# Altium PCB Super Green Pill PCB.PcbDoc
Units mm, origin at the board's own origin, x right, y up, seen from the top; angles counter-clockwise.
Board outline 56.37 x 60.54 mm, 2 copper layers (Top Layer, Bottom Layer); 51 components, 52 nets, 269 pads, 70 vias.
Unrouted connection lines stored in the file: 11.
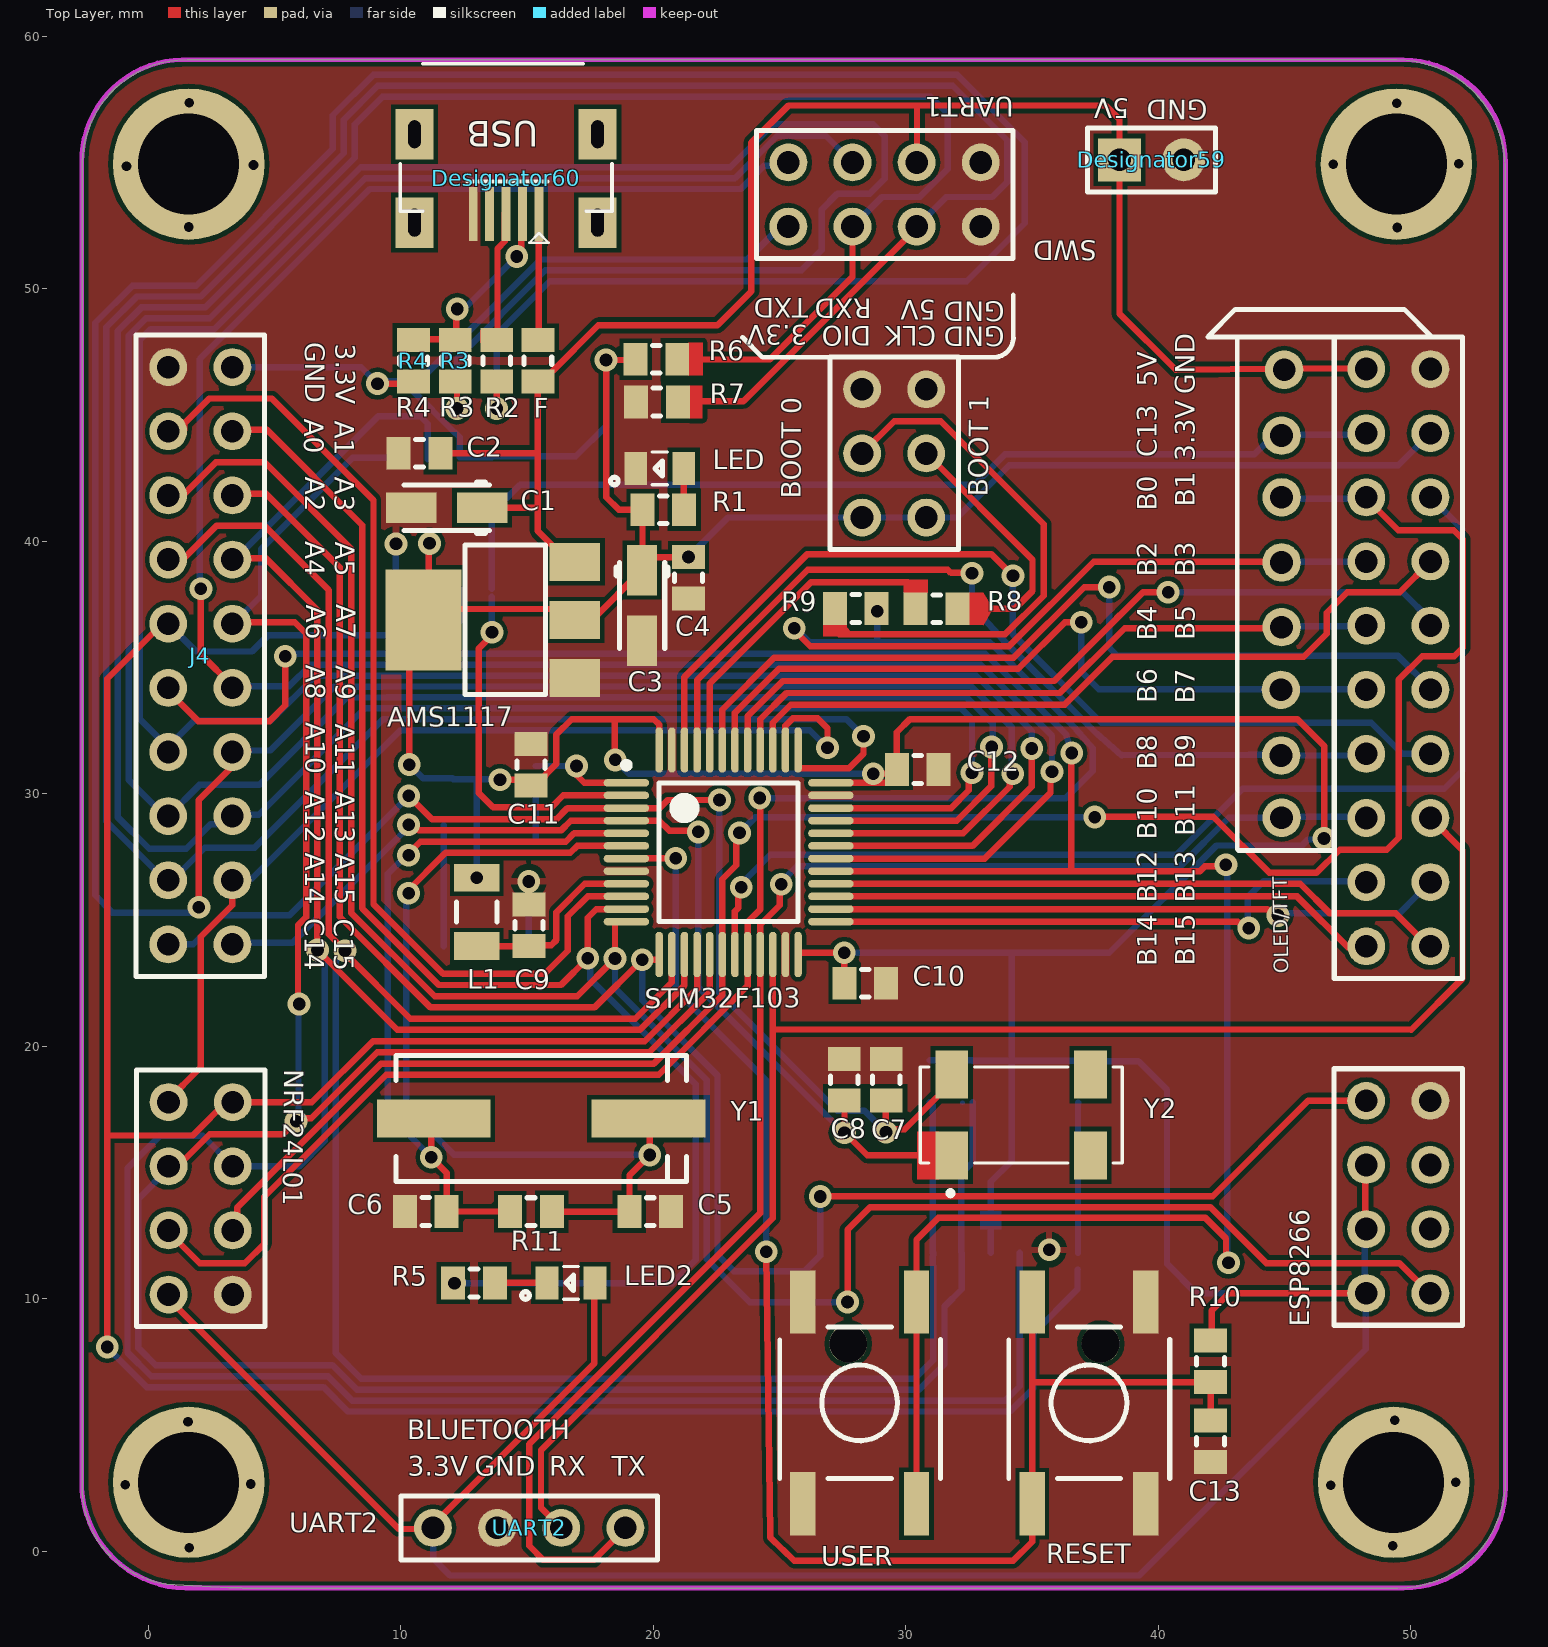
[diagram p0: Top Layer view]
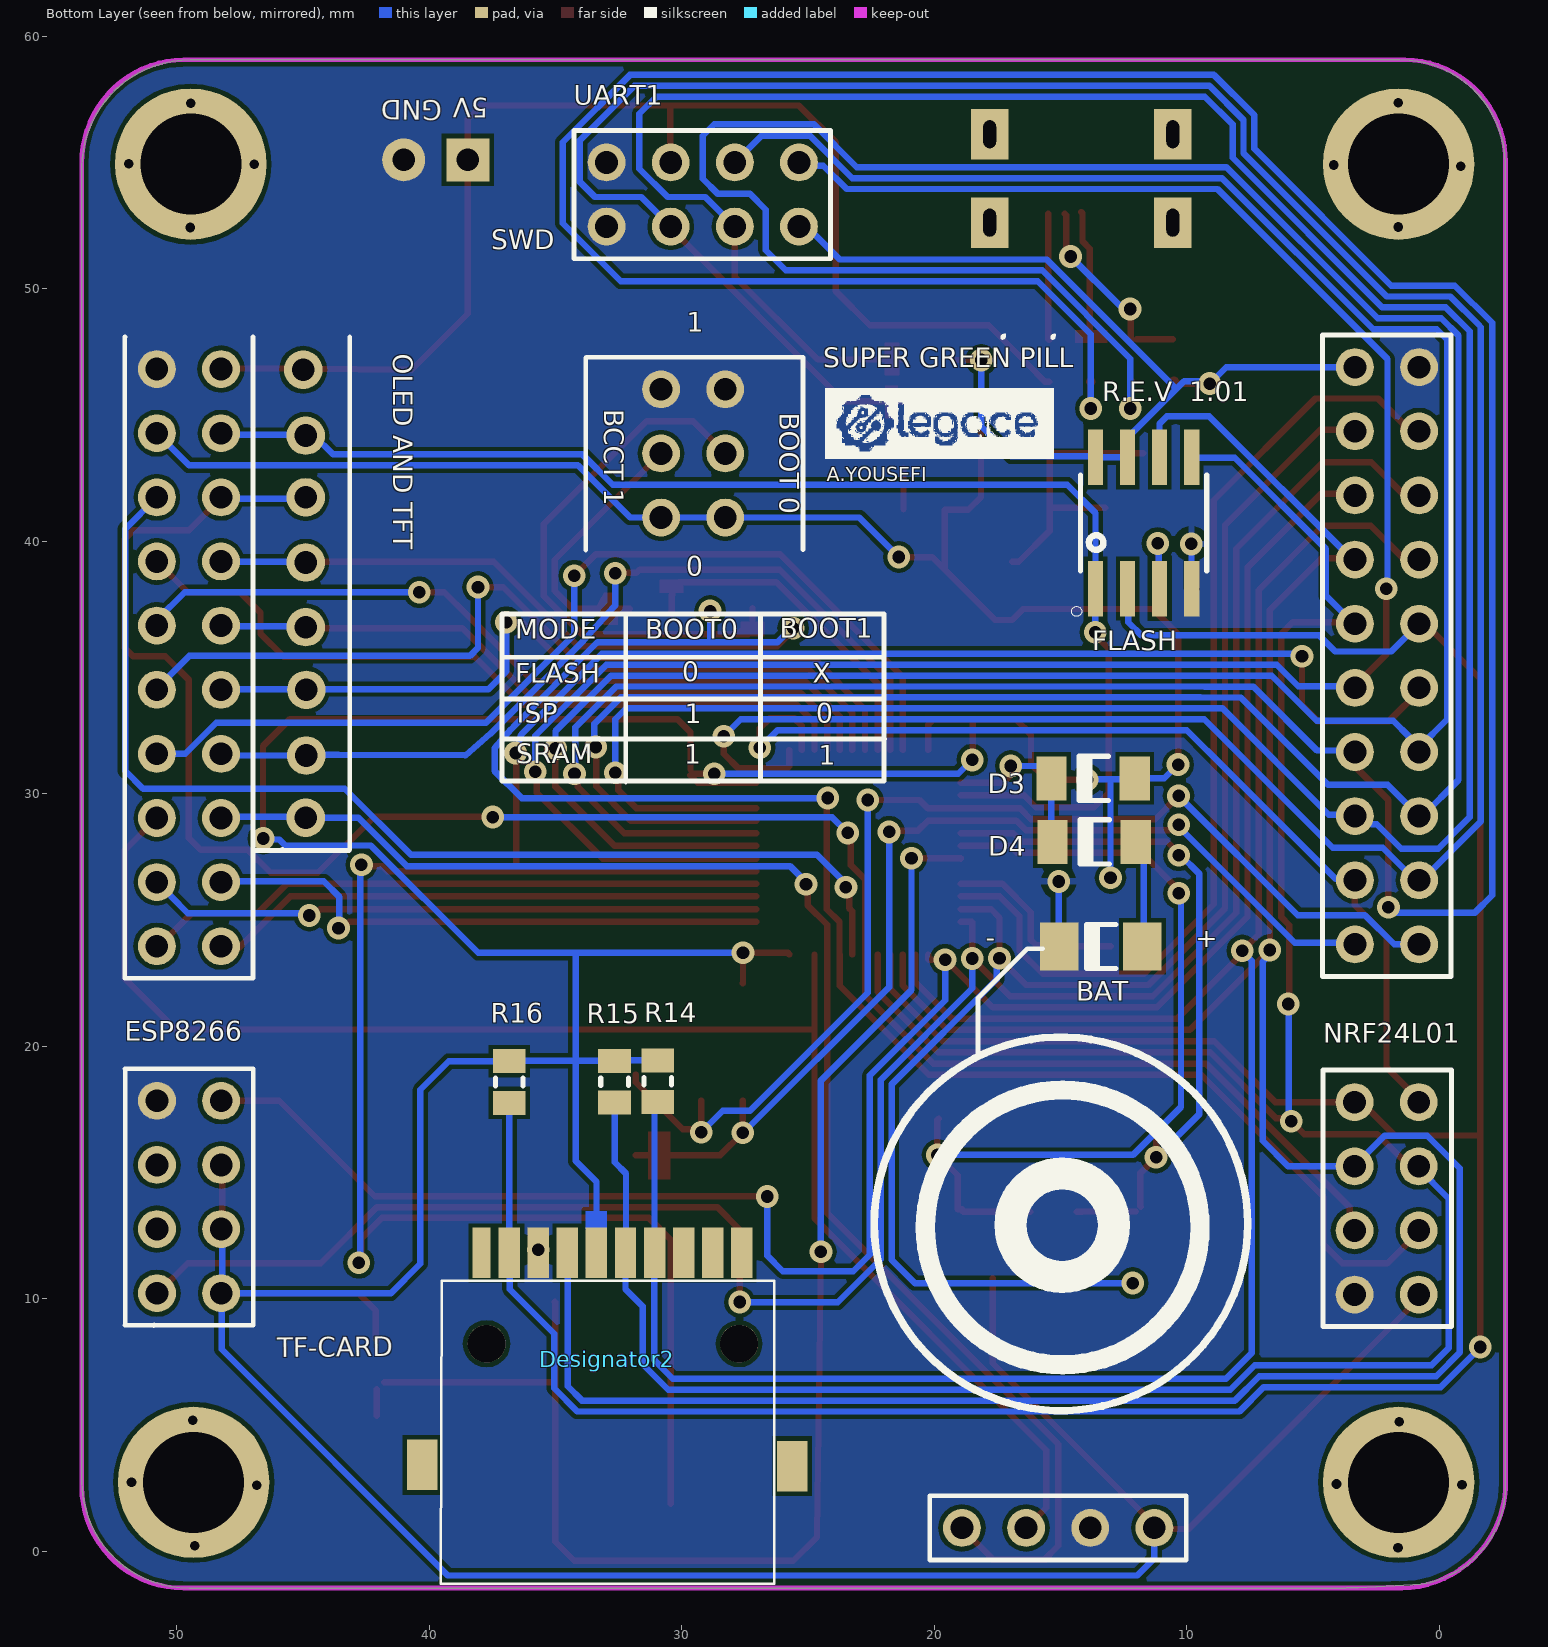
[diagram p1: Bottom Layer view, seen from below]

## Layer stack, top to bottom
Top Solder: solder mask 0.0102, Solder Resist, Dk 3.5
Top Layer: signal copper 0.0356
Dielectric 1: dielectric 0.32, FR-4, Dk 4.8
Bottom Layer: signal copper 0.0356
Bottom Solder: solder mask 0.0102, Solder Resist, Dk 3.5

## Board outline
1.051,-1.331 ccw(c1.056,-1.235) 1.052,-1.331 3.199,-1.45 3.2,-1.45 3.199,-1.45 ccw(c3.205,-1.355) 3.205,-1.451 3.707,-1.451 ccw(c3.75,-1.365) 3.75,-1.461 49.505,-1.461 ccw(c49.505,-1.365) 49.507,-1.461 cw(c49.507,-1.365) 49.505,-1.461 49.507,-1.461 ccw(c49.507,-1.365) 49.507,-1.461 ccw(c49.505,2.79) 53.756,2.79 53.756,54.773 ccw(c53.66,54.773) 53.753,54.794 ccw(c53.66,54.813) 53.755,54.813 ccw(c53.66,54.813) 53.755,54.814 ccw(c49.453,54.773) 49.453,59.076 1.534,59.076 ccw(c1.534,54.926) -2.615,54.966 ccw(c-2.52,54.965) -2.614,54.946 ccw(c-2.52,54.926) -2.616,54.926 -2.616,2.63 cw(c1.267,2.547) -2.616,2.631 -2.616,2.63 ccw(c1.267,2.547)

## Design rules (kind name [scope] priority, off if disabled: settings)
Clearance Clearance_1 [InNamedPolygon('Top Layer-GND')] p1: gap=0.254 ignorepadtopadclearanceinfootprint=FALSE
Clearance [All] p2: gap=0.178 ignorepadtopadclearanceinfootprint=TRUE
DiffPairsRouting [All] p1: maxlimit=0.254 minlimit=0.001 mostfreqgap=0.254 toplayer_minwidth=0.381 toplayer_maxwidth=0.381 toplayer_prefwidth=0.381 bottomlayer_minwidth=0.381 bottomlayer_maxwidth=0.381 bottomlayer_prefwidth=0.381 maxuncoupledlength=12.7
PolygonConnect PolygonConnect_3 [All vs IsNamedPolygon('GND_L02_P013')] p1: thpad.connectstyle=Direct thpad.reliefconductorwidth=0.254 thpad.reliefentries=4 thpad.polygonreliefangle="90 Angle" thpad.airgapwidth=0.254 smdpad.connectstyle=Direct smdpad.reliefconductorwidth=0.254 smdpad.reliefentries=4 smdpad.polygonreliefangle="90 Angle" smdpad.airgapwidth=0.254 via.connectstyle=Relief via.reliefconductorwidth=0.254 via.reliefentries=4 via.polygonreliefangle="90 Angle" via.airgapwidth=0.254
PolygonConnect PolygonConnect_2 [All vs IsNamedPolygon('GND_L01_P009')] p2: thpad.connectstyle=Direct thpad.reliefconductorwidth=0.254 thpad.reliefentries=4 thpad.polygonreliefangle="90 Angle" thpad.airgapwidth=0.254 smdpad.connectstyle=Direct smdpad.reliefconductorwidth=0.254 smdpad.reliefentries=4 smdpad.polygonreliefangle="90 Angle" smdpad.airgapwidth=0.254 via.connectstyle=Relief via.reliefconductorwidth=0.254 via.reliefentries=4 via.polygonreliefangle="90 Angle" via.airgapwidth=0.254
PolygonConnect PolygonConnect_1 [All vs IsNamedPolygon('Top Layer-GND')] p3: connectstyle=Relief reliefconductorwidth=0.254 reliefentries=4 polygonreliefangle="90 Angle" airgapwidth=0.254
PolygonConnect [All] p4: connectstyle=Relief reliefconductorwidth=0.254 reliefentries=4 polygonreliefangle="90 Angle" airgapwidth=0.254
RoutingTopology [All] p1: topology=Daisy_Simple
RoutingVias [All] p1: holewidth=0.5 width=0.9 viastyle="Through Hole" minholewidth=0.5 minwidth=0.9 maxholewidth=0.5 maxwidth=0.9
ShortCircuit [All] p1: allowed=TRUE
SolderMaskExpansion [All] p1: expansion=0.102 istentingtop=FALSE
Width [All] p1: maxlimit=0.254 minlimit=0.254 preferedwidth=0.254
27 further rules are at their usual default settings.

## Classes and differential pairs
component class WIFI: ESP8266
component class "TF CARD": R14 R15 R16
component class "SWD & BOOT": "BOOT 0" J8 R6 R7 R8 R9 UART1 UART2
component class STM32: AMS1117 BAT C1 C2 C3 C4 C5 C6 C7 C8 C9 C10 C11 C12 C13 D3 D4 F J4 L1 leD1 LED2 R1 R2 R3 R4 R5 R10 R11 RESET STM32F103 USER Y1 Y2
component class FLASH: FLASH lash
component class "2.4G INTERFACE": NRF24L01

## Components (designator, comment, footprint, x,y, rotation, side; value= is the part's Value field where it differs from the comment)
AMS1117 "AMS1117" "AMS1117 3.3" 10.905,36.888 r90 top locked
BAT "1N4148" LL4148#1 13.405,23.96 r0 bottom
"BOOT 0" "Header 3X2" HDR2X3 30.815,40.945 r90 top locked (schematic designator BOOT)
C1 "T491A" A 11.825,41.333 r180 top locked value=10uF
C2 "100nF" SMD_CAP_0805 11.57,43.492 r180 top locked
C3 "T491A" A 19.56,37.465 r270 top locked value=10uF
C4 "100nF" SMD_CAP_0805 21.4,39.38 r270 top locked
C5 "30pF" SMD_CAP_0805 19.06,13.455 r0 top locked
C6 "30pF" SMD_CAP_0805 11.825,13.46 r180 top locked
C7 "20pF" SMD_CAP_0805 29.235,19.505 r270 top locked
C8 "20pF" SMD_CAP_0805 27.57,19.505 r270 top locked
C9 "100nF" SMD_CAP_0805 15.08,23.97 r90 top locked
C10 "100nF" SMD_CAP_0805 27.58,22.5 r0 top locked
C11 "100nF" SMD_CAP_0805 15.165,30.33 r90 top
C12 "100nF" SMD_CAP_0805 31.3,30.965 r180 top locked
C13 "106" SMD_CAP_0805 42.077,3.531 r90 top locked
D3 "1N4148" LL4148#2 13.705,30.615 r0 bottom locked
D4 "1N4148" LL4148#2 13.665,28.1 r0 bottom locked
Designator2 "Comment" 112I-TDAR-R 31.725,11.575 r180 bottom
Designator59 "Comment" HDR-1X2 38.47,55.11 r0 top
Designator60 "Comment" USB-Micro_B/4legs 14.175,56.125 r180 top
ESP8266 "Header 4X2" HDR2X4 50.78,10.225 r90 top (schematic designator "J6 ESP8266")
F "18R" SMD_RES_0805 15.435,46.325 r90 top (schematic designator FUSE)
FLASH "AT45DB041E-SSHNHA-T" *SOIC127P600X175-8N 11.705,40.73 r90 bottom locked (schematic designator "FLASH 2")
J3 "Header 10X2" HDR2X10#1 48.245,23.965 r90 top locked
J4 "Header 10X2" HDR2X10#2 3.335,24.04 r90 top
L1 "Inductor" INDC3216 13.015,25.325 r270 top locked value=10mH (schematic designator L1100uH)
LED "LSR976" *0805_R_LSR976(Primary) 20.265,42.89 r180 top locked (schematic designator D1)
LED2 "LSR976" *0805_R_LSR976(Primary) 16.745,10.635 r180 top (schematic designator D2)
NRF24L01 "Header 4X2" HDR2X4 3.35,10.17 r90 top
R1 "1.5K" SMD_RES_0805 21.23,41.25 r180 top locked
R2 "18R" SMD_RES_0805 13.805,47.975 r270 top
R3 "18R" SMD_RES_0805 12.165,47.985 r270 top
R4 "1.5K" SMD_RES_0805 10.505,47.985 r270 top
R5 "1.5K" SMD_RES_0805 13.73,10.625 r180 top
R6 "10K" SMD_RES_0805 20.955,47.215 r180 top
R7 "10K" SMD_RES_0805 19.325,45.52 r0 top
R8 "100K" SMD_RES_0805 30.4,37.33 r0 top locked
R9 "100K" SMD_RES_0805 27.195,37.345 r0 top locked
R10 "10K" SMD_RES_0805 42.077,8.356 r270 top locked
R11 "1M" SMD_RES_0805 15.985,13.455 r180 top locked
R14 "10K" SMD_RES_0805 30.95,19.445 r270 bottom locked
R15 "10K" SMD_RES_0805 32.655,19.43 r270 bottom locked
R16 "10K" SMD_RES_0805 36.83,19.415 r270 bottom locked
RESET "RESET" SW-PB 37.26,5.88 r90 top locked (schematic designator S1)
STM32F103 "STM32F103C8T6" LQFP48_N 22.99,27.689 r0 top locked (schematic designator STM)
UART1 "Header 4X2" HDR2X4 25.355,52.47 r0 top (schematic designator "J7 - UART")
UART2 "BLUTOOTH" HDR1X4 11.28,0.93 r0 top (schematic designator J8)
USER "Switch PB" SW-PB 28.18,5.88 r90 top locked (schematic designator S2)
Y1 "12 MHz" "Crystal SMD" 16.135,17.14 r180 top locked
Y2 "ABS25-32.768KHZ-6-T" *XTAL_ABS25-32.768KHZ-6-T 34.575,17.285 r90 top locked

## Footprints (in the part's own frame and the unit in brackets; to place one, negate y for a bottom-side part, rotate by r counter-clockwise, add the part's x,y. Pads: shape width x height; smd on the part's side, far side on the other; paste and mask are expansions set on the pad)
112I-TDAR-R [mm]
  rect 0.7x2 smd: 1(-6.2,0.25)
  rect 0.85x2 smd: 2(-5.1,0.25) 3(-3.95,0.25) 4(-2.8,0.25) 5(-1.65,0.25) 6(-0.5,0.25) 7(0.65,0.25) 8(1.8,0.25) 9(2.95,0.25) 10(4.1,0.25)
  rect 1.2x2 smd: 11(-8.55,-8.15) 12(6.1,-8.2)
  round 1.5 hole 1.5: 13(-6,-3.35) 14(4,-3.35)
  silkscreen extent -7.82,-12.85 5.4,-0.85
*0805_R_LSR976(Primary) [mm]
  rect 0.9x1.3 smd: A(-0.95,0) C(0.95,0)
  silkscreen extent -0.3,-0.65 1.95,0.65
*SOIC127P600X175-8N [mm]
  rect 2.2x0.6 smd: 1(-2.6,1.905) 2(-2.6,0.635) 3(-2.6,-0.635) 4(-2.6,-1.905) 5(2.6,-1.905) 6(2.6,-0.635) 7(2.6,0.635) 8(2.6,1.905)
  silkscreen extent -3.7,-2.5 1.9,2.85
*XTAL_ABS25-32.768KHZ-6-T [mm]
  rect 1.9x1.3 smd: 1(-1.6,2.75) 2(-1.6,-2.75) 3(1.6,-2.75) 4(1.6,2.75)
  silkscreen extent -3.2,-4 1.9,4
A [mm] "Capacitor, SM Tantalum; Body 3.2 x 1.6 mm (LxW typ)"
  rect 2x1.2 smd: 1(-1.4,0) 2(1.4,0)
  silkscreen extent -1.7,-1 1.7,1, body extent -1.6,-0.8 1.6,0.8, height 1.6
"AMS1117 3.3" [mm]
  rect 1.5x2 smd: 1(-2.3,-6) 2(0,-6) 3(2.3,-6)
  rect 4x3 smd: 2(0,0)
  silkscreen extent -2.95,-4.82 2.97,-1.65, body extent -3.28,-6.68 3.22,0.32, height 1.85
"Crystal SMD" [mm]
  rect 4.5x1.5 smd: 1(-3.683,0) 2(4.817,0)
  silkscreen extent -5.18,-2.5 6.32,2.5, body extent -5.64,-2.25 6.66,2.25, height 5.18
HDR1X4 [mm] "Connector; Header; 4 Position"
  round 1.5 hole 0.9: 1(0,0) 2(2.54,0) 3(5.08,0) 4(7.62,0)
  silkscreen extent -1.27,-1.27 8.89,1.27
HDR2X3 [mm] "Connector; Header; 3x2 Position"
  round 1.5 hole 0.9: 1(0,0) 2(0,2.54) 3(2.54,0) 4(2.54,2.54) 5(5.08,0) 6(5.08,2.54)
  silkscreen extent -1.27,-1.27 6.35,3.81
HDR2X4 [mm] "Connector; Header; 4x2 Position"
  round 1.5 hole 0.9: 1(0,0) 2(0,2.54) 3(2.54,0) 4(2.54,2.54) 5(5.08,0) 6(5.08,2.54) 7(7.62,0) 8(7.62,2.54)
  silkscreen extent -1.27,-1.27 8.89,3.81
HDR2X10#1 [mm] "Connector; Header; 10x2 Position"
  round 1.5 hole 0.9: 1(0,0) 2(0,-2.54) 3(2.54,0) 4(2.54,-2.54) 5(5.08,0) 6(5.08,-2.54) 7(7.62,0) 8(7.62,-2.54) 9(10.16,0) 10(10.16,-2.54) 11(12.7,0) 12(12.7,-2.54) 13(15.24,0) 14(15.24,-2.54) 15(17.78,0) 16(17.78,-2.54) 17(20.32,0) 18(20.32,-2.54) 19(22.86,0) 20(22.86,-2.54)
  silkscreen extent -1.27,-3.81 24.13,1.27
HDR2X10#2 [mm] "Connector; Header; 10x2 Position"
  round 1.5 hole 0.9: 1(0,0) 2(0,2.54) 3(2.54,0) 4(2.54,2.54) 5(5.08,0) 6(5.08,2.54) 7(7.62,0) 8(7.62,2.54) 9(10.16,0) 10(10.16,2.54) 11(12.7,0) 12(12.7,2.54) 13(15.24,0) 14(15.24,2.54) 15(17.78,0) 16(17.78,2.54) 17(20.32,0) 18(20.32,2.54) 19(22.86,0) 20(22.86,2.54)
  silkscreen extent -1.27,-1.27 24.13,3.81
HDR-1X2 [mm] "إإصë£¬2½إ"
  rect 1.7x1.7 hole 0.9: 1(0,0)
  round 1.7 hole 0.9: 2(2.54,0)
  silkscreen extent -1.27,-1.27 3.81,1.27, body extent -1.27,-1.27 3.81,1.27, height 8.5
INDC3216 [mm] "Chip Inductor, Body 3.2x1.6mm, IPC High Density"
  rect 1.1x1.8 smd: 1(-1.35,0) 2(1.35,0)
  silkscreen extent -0.4,-0.8 0.4,0.8
LL4148#1 [mm] "MELF Diode, 2-Leads, Body 3.5x1.4mm, IPC Medium Density"
  rect 1.524x1.905 smd: 1(-1.65,0) 2(1.65,0)
  silkscreen extent -0.61,-0.88 0.57,0.87, body extent -1.78,-0.75 1.72,0.75, height 1.55
LL4148#2 [mm] "MELF Diode, 2-Leads, Body 3.5x1.4mm, IPC Medium Density"
  rect 1.2x1.75 smd: 1(-1.65,0) 2(1.65,0)
  silkscreen extent -0.61,-0.87 0.57,0.87, body extent -1.78,-0.75 1.72,0.75, height 1.55
LQFP48_N [mm] "Thin QFP, 48-Leads, Body 7x7mm, Pitch 0.5mm, IPC Medium Density"
  oval 1.8x0.3 smd: 1(-4.05,2.75) 2(-4.05,2.25) 3(-4.05,1.75) 4(-4.05,1.25) 5(-4.05,0.75) 6(-4.05,0.25) 7(-4.05,-0.25) 8(-4.05,-0.75) 9(-4.05,-1.25) 10(-4.05,-1.75) 11(-4.05,-2.25) 12(-4.05,-2.75) 25(4.05,-2.75) 26(4.05,-2.25) 27(4.05,-1.75) 28(4.05,-1.25) 29(4.05,-0.75) 30(4.05,-0.25) 31(4.05,0.25) 32(4.05,0.75) 33(4.05,1.25) 34(4.05,1.75) 35(4.05,2.25) 36(4.05,2.75)
  oval 0.3x1.8 smd: 13(-2.75,-4.05) 14(-2.25,-4.05) 15(-1.75,-4.05) 16(-1.25,-4.05) 17(-0.75,-4.05) 18(-0.25,-4.05) 19(0.25,-4.05) 20(0.75,-4.05) 21(1.25,-4.05) 22(1.75,-4.05) 23(2.25,-4.05) 24(2.75,-4.05) 37(2.75,4.05) 38(2.25,4.05) 39(1.75,4.05) 40(1.25,4.05) 41(0.75,4.05) 42(0.25,4.05) 43(-0.25,4.05) 44(-0.75,4.05) 45(-1.25,4.05) 46(-1.75,4.05) 47(-2.25,4.05) 48(-2.75,4.05)
  silkscreen extent -4.17,-2.75 2.75,3.57, body extent -3.5,-3.5 3.5,3.5, height 1.6
SMD_CAP_0805 [mm]
  rect 0.95x1.3 smd: 1(0,0) 2(1.65,0)
  silkscreen extent 0.67,-0.55 0.98,0.55, body extent -0.19,-0.63 1.84,0.63, height 0.65
SMD_RES_0805 [mm] "Chip Resistor, 2-Leads, Body 2.0x1.3mm, IPC High Density _ (0.100 W)"
  rect 0.95x1.3 smd: 1(0,0) 2(1.65,0)
  silkscreen extent 0.68,-0.55 0.97,0.55, body extent -0.19,-0.63 1.84,0.64, height 0.6
SW-PB [mm]
  rect 2.5x1 smd: 1(-3.992,2.25) 1(3.993,2.25) 2(-3.992,-2.25) 2(3.993,-2.25)
  silkscreen extent -3,-3.2 3,3.18, body extent -4.5,-3 4.5,3, height 5
USB-Micro_B/4legs [mm] "microï؟½ï؟½USB ï؟½ï؟½5.7*7.8*2.5mm"
  rect 0.35x2.15 smd: 1(-1.3,3.154) 2(-0.65,3.154) 3(0,3.154) 4(0.65,3.154) 5(1.3,3.154)
  rect 1.5x2 hole 0.5 slot 1.1 at 90 deg: 5(-3.625,0) 5(-3.625,3.5) 5(3.625,3.5) 5(3.625,0)
  silkscreen extent -4.19,-2.79 4.19,4.3, body extent -4,-2.72 4,3.88, height 2.7

## Part data
BAT D3 D4: library part "Diode 1N4148", "High Conductance Fast Diode", Code_JEDEC=DO-204-AH, ComponentLink1Description="Manufacturer Link", ComponentLink1URL=http://www.fairchildsemi.com/, ComponentLink2Description=Datasheet, ComponentLink2URL=http://www.fairchildsemi.com/ds/1N%2F1N4148.pdf, DatasheetVersion=1997, LatestRevisionDate=17-Jul-2002, LatestRevisionNote="Re-released for DXP Platform.", PackageDescription="Diode, Axial; Body 3.8 x 1.9 mm (LxDia. max), Lead Dia. 0.53 mm (max)", PackageReference=DO-35, Published=8-Jun-2000, Publisher="Altium Limited"
"BOOT 0": "Header, 3-Pin, Dual row", LatestRevisionDate=17-Jul-2002, LatestRevisionNote="Re-released for DXP Platform.", Publisher="Altium Limited"
C1 C3: "Solid Tantalum Chip Capacitor, Standard T491 Series - Industrial Grade", PackageDocument=Mar-2001, Code_JEITA=3216-18, ComponentLink1Description="Manufacturer Link", ComponentLink1URL=http://www.kemet.com/, ComponentLink2Description=Datasheet, ComponentLink2URL=http://www.kemet.com/kemet/web/homepage/kechome.nsf/vapubfilesname/F3102TA.pdf/$file/F3102TA.pdf, DatasheetDocument=Mar-2001, LatestRevisionDate=19-Mar-2004, LatestRevisionNote="Silkscreen dimensions re-sized.", PackageReference=A, Published=17-Jul-2002, Publisher="Altium Limited"
C2 C4 C5 C6 C7 C8 C9 C10 C11 C12 C13: library part Cap-Bipolar, "Bipolar Capacitor", Voltage=100V, Adding Date=1387/12/20, Designer="Saeid Jorablo", Organazation=ControTec
ESP8266 NRF24L01 UART1: "Header, 4-Pin, Dual row", LatestRevisionDate=17-Jul-2002, LatestRevisionNote="Re-released for DXP Platform.", Publisher="Altium Limited"
F R1 R2 R3 R4 R5 R6 R7 R8 R9 R11 R14 R15 R16: library part Resistor, "Resistor", Power="1/8 W", Tolerance=5%
FLASH: "Memory: Serial Flash; 4Mbit; SPI / RapidS; 85MHz; 1.65أ·3.6V; SO8", Package="SOIC-8 Adesto Technologies", Availability=Unavailable, MF=Adesto, MP=AT45DB041E-SSHNHA-T, Price=None, SnapEDA_Link=https://www.snapeda.com/parts/AT45DB041E-SSHNHA-T/Adesto%20Technologies/view-part/?ref=snap
J3 J4: "Header, 10-Pin, Dual row", LatestRevisionDate=17-Jul-2002, LatestRevisionNote="Re-released for DXP Platform.", Publisher="Altium Limited"
LED LED2: "SMD LED [Osram Semiconductors] LSR976 SMD LED", Package="0805 Osram", Availability=Unavailable, MF="OSRAM Opto", MP=LSR976, Price=None, SnapEDA_Link=https://www.snapeda.com/parts/LSR976/OSRAM%20Opto%20Semiconductors%20Inc./view-part/?ref=snap
R10: library part Resistor, "Resistor", Power="1/8 W", Tolerance=9
RESET: library part "Switch PB", "Push Button Switch"
STM32F103: "STM32 ARM-based 32-bit MCU with 64 Kbytes Flash, 48-pin LQFP, Industrial Temperature", ComponentLink1Description="Manufacturer Link", ComponentLink1URL=www.st.com/stm32, ComponentLink2Description=Datasheet, ComponentLink2URL=http://www.st.com/stonline/products/literature/ds/13587.pdf, DatasheetVersion="rev6, Mar-2008", PackageDescription="48-Pin Low-Profile Quad Flat Pack, 7 x 7 mm Body, 0.5 mm Pitch (LQFP48)", PackageReference=LQFP48, PackageVersion=Mar-2008, Published=30-May-2008, Publisher="Altium Limited"
UART2: library part "Header 4", "Header, 4-Pin", LatestRevisionDate=17-Jul-2002, LatestRevisionNote="Re-released for DXP Platform.", Publisher="Altium Limited"
USER: "Push Button Switch"
Y1: library part XTAL, "XTAL Crystal", ComponentLink1Description=Datasheet, ComponentLink2Description=Reference, Design Date=2017-1-3, Designer="ABBAS BASEREH", Mounting Technology="Surface Mount\Through-Hole", Status=Unreleased
Y2: "ABS25 Series 32.768 kHz آ±20 ppm 6 pF -40 to +85 آ°C SMT Low Frequency Crystal", Package="4-4 Abracon", Availability=Unavailable, MF=Abracon, MP=ABS25-32.768KHZ-6-T, Price=None, SnapEDA_Link=https://www.snapeda.com/parts/ABS25-32.768KHZ-6-T/Abracon%20LLC/view-part/?ref=snap
L1: Code_IEC=1005, Code_JEITA=0402, LatestRevisionDate=29-May-2009, LatestRevisionNote="IPC-7351 Footprint Added.", PackageDescription="Chip Inductor", PackageReference=0402-A, Published=8-Jun-2000, Publisher="Altium Limited"

## Free pads (board coordinates)
  round 1.524 hole 0.9: 3(44.991,46.797) 4(44.889,44.19) 5(44.89,41.745) 6(44.889,39.165) 7(44.889,36.605) 8(44.863,34.12) 9(44.87,31.52) 10(44.89,29.055)
  round 0.381 hole 0.381: 15(-0.905,2.645) 15(-0.86,54.86) 15(1.58,5.135) 15(1.615,52.45) 15(1.625,57.37) 15(1.63,0.14) 15(4.065,2.67) 15(4.17,54.905) 15(46.835,2.62) 15(46.93,54.935) 15(49.285,0.215) 15(49.37,5.195) 15(49.45,57.36) 15(49.465,52.43) 15(51.79,2.73) 15(51.9,54.96)
  round 6 hole 4: 16(1.605,2.73) 16(1.605,54.945) 16(49.33,2.73) 16(49.44,54.945)

## Via types
v1: diameter 0.9, hole 0.5, Top Layer to Bottom Layer, tented both sides, 67 vias
v2: diameter 0.9, hole 0.5, Top Layer to Bottom Layer, 3 vias

## Nets (pads, with @x,y where several pads share a name; then routed paths per layer and width w, separated by ;. In a path a pad name is that pad's centre, name@x,y a point inside that pad or via, vN(x,y) a via of type N, cw(c..) or ccw(c..) an arc to the next point about the centre after c; other vN are vias at no path point)
BOOT0: R8.1 STM32F103.44 | length 13.5
  Top Layer w0.254: STM32F103.44 22.24,34.37 26.259,38.389 30.091,38.389 30.375,38.105 30.375,37.88 30.395,37.86 R8.1@30.395,37.135
GND: "BOOT 0.5" "BOOT 0.6" AMS1117.1 BAT.2 C1.2 C2.2 C3.2 C4.2 C5.2 C6.2 C7.1 C8.1 C9.2 C10.2 C11.2 C12.1 C13.1 Designator2.3 Designator59.2 Designator60.5@12.875,52.971 ESP8266.7 FLASH.4 J3.20 J4.20 LED.C NRF24L01.1 R7.1 RESET.2 STM32F103.8 STM32F103.23 STM32F103.35 STM32F103.47 UART1.7 UART1.8 UART2.2 USER.1 | length 4.5
  Bottom Layer w0.254: FLASH.4 9.808,38.138 9.808,39.893 v2(9.815,39.9) ; BAT.2 15.07,23.975 v2(15.07,26.53) ; Designator2.3 35.675,11.935 v2(35.685,11.945)
NetBAT_1: BAT.1 D4.1 | length 4.8
  Bottom Layer w0.254: D4.1@11.7,28.765 11.7,28.5 11.705,28.495 BAT.1@11.705,23.97
NetBOOT_3: "BOOT 0.3" R8.2 | length 10.5
  Top Layer w0.254: 30.815,43.485 35.026,39.274 35.026,38.037 34.313,37.325 32.616,37.325 32.05,37.325 R8.2
NetBOOT_4: "BOOT 0.4" R9.1 | length 22.1
  Top Layer w0.254: R9.1 27.195,36.5 27.364,36.331 33.948,36.331 35.471,37.853 35.471,40.679 31.39,44.76 29.55,44.76 28.275,43.485
NetD1_A: LED.A R1.1 | length 1.6
  Top Layer w0.254: R1.1@21.215,41.265 LED.A
NetD2_C: LED2.C R5.1 | length 2
  Top Layer w0.254: R5.1@13.715,10.645 LED2.C@15.735,10.645
NetR2_1: Designator60.3 R2.1 | length 5.6
  Top Layer w0.191: R2.1@13.675,48.105 R2.1 13.868,48.038 R2.1@13.91,48.08
  Top Layer w0.254: R2.1@13.816,48.253 13.868,48.202 R2.1@13.868,48.163 ; R2.1@13.828,48.163 13.785,48.12 13.835,48.17 13.835,51.59 14.127,51.882 14.127,52.999 Designator60.3@14.175,53.047
NetR3_1: Designator60.2 R3.1 R4.1 | length 7.7
  Top Layer w0.254: R4.1@10.545,48.005 R3.1@11.975,48.005 ; R3.1 12.21,48.03 12.21,49.175 v1(12.24,49.205) ; v1(14.598,51.285) 14.598,51.46 14.777,51.639 14.777,52.923 Designator60.2
  Bottom Layer w0.254: v1(12.24,49.205) 12.364,49.329 12.641,49.329 v1(14.598,51.285)
NRST: C13.2 R10.2 RESET.1 STM32F103.7 | length 58.6
  Top Layer w0.254: STM32F103.7 18.945,27.444 20.894,27.444 v1(20.899,27.449) ; v1@24.481,11.785 24.642,0.653 24.644,0.547 25.588,-0.37 34.255,-0.37 35.01,0.385 35.01,1.888 35.01,9.873 RESET.1@35.02,9.882 ; 35.06,6.706 R10.2@41.784,6.706 ; C13.2@42.077,5.372 R10.2@42.077,6.413
  Bottom Layer w0.254: v1(20.899,27.449) 20.899,22.235 24.485,18.649 v1(24.485,11.865)
PA.0: J4.18 STM32F103.10 | length 39.1
  Top Layer w0.254: J4.18@1.43,44.42 1.43,44.67 2.42,45.66 4.9,45.66 8.925,41.635 8.925,25.63 11.68,22.875 15.706,22.875 16.62,23.79 16.62,25.154 17.405,25.939 STM32F103.10
PA.1: J4.17 R5.2 STM32F103.11 | length 59.4
  Top Layer w0.254: J4.17@3.37,44.42 4.705,44.42 8.481,40.645 8.481,25.464 11.513,22.431 16.35,22.431 v1(17.412,23.493) 17.412,25.097 17.745,25.43 18.931,25.43 STM32F103.11
  Bottom Layer w0.254: v1(12.135,10.625) 20.76,10.625 21.686,11.551 21.686,18.492 17.517,22.662 17.517,23.389 v1(17.412,23.493)
PA.2: ESP8266.1 J4.16 STM32F103.12 | length 84.8
  Top Layer w0.254: J4.16@1.43,41.88 2.685,43.135 4.615,43.135 8.036,39.714 8.036,25.298 11.347,21.986 16.997,21.986 v1(18.49,23.48) 18.49,24.918 18.511,24.939 STM32F103.12 ; v1(27.7,9.875) 27.7,12.74 28.597,13.637 42.068,13.637 44.29,11.415 49.56,11.415 ESP8266.1@50.798,10.178
  Bottom Layer w0.254: v1(18.49,23.48) 18.49,22.299 22.118,18.671 22.118,11.566 23.824,9.86 v1@27.75,9.86
PA.3: ESP8266.8 J4.15 STM32F103.13 | length 76.8
  Top Layer w0.254: J4.15@3.97,41.88 4.68,41.88 7.592,38.968 7.592,25.132 11.181,21.542 17.677,21.542 v1(19.567,23.431) ; v1@19.601,23.431 20.219,23.431 20.24,23.453 STM32F103.13 ; v1(26.615,14.055) 26.629,14.069 42.159,14.069 45.935,17.845 ESP8266.8
  Bottom Layer w0.254: v1(19.567,23.431) 19.567,21.833 22.55,18.85 22.55,11.745 23.2,11.095 25.995,11.095 26.615,11.715 v1(26.615,14.055)
PA.4: Designator2.7 J4.14 R14.2 STM32F103.14 | length 88.4
  Top Layer w0.254: J4.14@1.43,39.34 2.705,40.615 4.605,40.615 7.147,38.073 7.147,24.444 v1(7.798,23.793) ; v1@7.743,23.737 10.383,21.097 19.295,21.097 20.74,22.542 STM32F103.14
  Bottom Layer w0.254: v1(7.798,23.793) 7.798,23.763 7.425,23.39 7.425,7.857 8.443,6.839 30.353,6.839 31.09,7.576 31.09,11.128 31.07,11.535 31.075,11.54 31.075,11.604 Designator2.7@31.091,11.824 ; R14.2 31.075,17.67 Designator2.7
PA.5: Designator2.4 FLASH.6 J4.13 NRF24L01.5 STM32F103.15 | length 113.1
  Top Layer w0.254: J4.13@3.206,39.34 4.65,39.34 6.703,37.287 6.703,24.937 ; 6.7,24.935 6.7,23.823 9.87,20.653 19.479,20.653 21.24,22.414 STM32F103.15
  Bottom Layer w0.254: J4.13 3.435,39.28 9.105,44.95 10.79,44.95 11.075,44.665 FLASH.6@11.075,43.25 ; v1(6.705,23.818) 6.705,23.645 6.99,23.36 6.99,16.26 5.975,15.245 3.38,15.245 2.165,16.46 0.465,16.46 -0.817,15.178 -0.817,7.876 0.121,6.938 7.122,6.938 8.089,5.972 33.951,5.972 34.515,6.536 Designator2.4@34.515,11.825
PA.6: Designator2.2 FLASH.2 J4.12 NRF24L01.7 R16.2 STM32F103.16 | length 120
  Top Layer w0.254: v1(-1.625,8.092) -1.625,16.47 ; J4.12@0.615,36.8 -1.625,34.56 -1.625,16.47 ; NRF24L01.7@3.216,17.924 1.761,16.47 -1.625,16.47 ; NRF24L01.7 6.485,17.79 8.904,20.208 19.664,20.208 21.74,22.285 STM32F103.16
  Bottom Layer w0.254: v1(-1.625,8.092) -1.625,8.074 -0.058,6.506 6.944,6.506 7.91,5.54 34.13,5.54 35.05,6.46 35.05,8.62 36.808,10.378 36.808,11.148 Designator2.2@36.825,11.165 ; J4.12 1.895,35.64 4.11,35.64 4.745,36.275 11.79,36.275 12.313,36.798 12.313,38.103 FLASH.2 ; Designator2.2 36.825,17.76 R16.2
PA.7: Designator2.6 FLASH.5 J4.11 NRF24L01.6 R15.2 STM32F103.17 | length 109.6
  Top Layer w0.254: NRF24L01.6@0.83,15.195 1.115,15.195 2.445,16.525 5.348,16.525 5.982,17.159 6.464,17.159 9.07,19.764 19.848,19.764 22.24,22.156 STM32F103.17 ; J4.11@3.97,36.8 5.805,36.8 6.258,36.347 6.258,25.122 5.935,24.799 5.935,21.723 v1(5.978,21.68)
  Bottom Layer w0.191: R15.2@32.24,17.764 R15.2@32.265,17.764
  Bottom Layer w0.254: NRF24L01.6@0.825,15.18 -0.385,13.97 -0.385,8.055 0.3,7.37 7.301,7.37 8.268,6.404 30.529,6.404 31.54,7.415 31.54,9.7 32.225,10.385 Designator2.6 32.205,11.845 32.205,14.965 32.655,15.415 R15.2 ; J4.11@3.353,36.723 4.48,37.85 4.48,39.7 8.095,43.315 9.785,43.315 FLASH.5 ; v1(5.858,17.035) 5.955,17.132 5.955,21.658 v1(5.978,21.68)
PA.8: J4.10 STM32F103.29 USER.2 | length 101.1
  Top Layer w0.254: J4.10@0.733,34.138 1.985,32.885 4.81,32.885 5.431,33.506 5.431,35.449 v1(5.434,35.451) ; STM32F103.29 36.552,26.939 ; USER.2@30.43,1.888 30.43,9.873 30.43,12.34 31.295,13.205 41.875,13.205 42.688,12.392 42.688,11.532 v1(42.786,11.434) ; v1(36.578,31.618) 36.552,31.592 36.552,26.939 ; v1(42.685,27.194) 42.627,27.136 41.854,27.136 41.657,26.939 36.552,26.939
  Bottom Layer w0.254: v1(5.434,35.451) 5.528,35.546 8.741,35.546 8.743,35.548 33.158,35.548 36.356,32.35 v1(36.578,31.618) ; v1(42.685,27.194) 42.736,27.143 42.736,11.484 v1(42.786,11.434)
PA.9: J4.9 STM32F103.30 UART1.2 | length 86.6
  Top Layer w0.254: v1(2.09,38.12) 2.09,35.52 3.35,34.26 J4.9@3.97,34.26 ; STM32F103.30 33.129,27.439 35.737,30.047 35.737,30.818 v1(35.796,30.877)
  Bottom Layer w0.254: v1@2.045,38.18 2.045,47.222 8.78,53.957 23.467,53.957 24.392,54.882 25.227,54.882 UART1.2 ; J4.9@3.33,34.26 5.581,34.26 6.435,35.114 8.92,35.114 8.922,35.116 32.979,35.116 35.798,32.297 35.798,30.878 v1(35.796,30.877)
PA.10: J4.8 STM32F103.31 UART1.4 | length 95.7
  Top Layer w0.254: STM32F103.31 32.649,27.939 35,30.29 35,31.795 v1(34.996,31.799)
  Bottom Layer w0.254: J4.8 0.795,31.835 -0.322,32.952 -0.322,47.989 0.092,48.403 2.615,48.403 8.601,54.388 23.239,54.388 24.915,56.065 26.84,56.065 UART1.4 ; J4.8@1.175,32.255 1.815,32.895 4.845,32.895 6.632,34.682 9.099,34.682 9.101,34.684 32.8,34.684 34.996,32.488 v1(34.996,31.799)
PA.11: J4.7 R2.2 STM32F103.32 | length 149.2
  Top Layer w0.254: v1(2.009,25.51) 2.009,29.759 J4.7@3.97,31.72 ; v1@13.8,45.2 R2.2@13.8,46.32 ; STM32F103.32 32.274,28.439 34.122,30.287 34.122,30.676 v1(34.245,30.8)
  Top Layer w0.381: R2.2@13.8,46.32 R2.2
  Bottom Layer w0.254: v1(2.009,25.51) 1.799,25.3 -1.42,25.3 -2.1,25.98 -2.1,48.653 -0.623,50.13 1.9,50.13 7.316,55.546 7.316,56.871 8.92,58.475 32.05,58.475 34.715,55.81 34.715,52.6 32.416,50.301 15.903,50.301 13.8,48.199 v1@13.8,45.2 ; J4.7@3.97,31.72 4.835,31.72 7.365,34.25 9.278,34.25 9.28,34.252 32.593,34.252 34.135,32.71 34.21,32.636 34.21,30.836 v1(34.245,30.8)
  other v1: 13.8,45.265
PA.12: J4.6 R3.2 STM32F103.33 | length 123.4
  Top Layer w0.254: R3.2 12.23,46.27 v1(12.23,45.265) ; STM32F103.33 32.024,28.939 33.383,30.298 33.383,31.837 v1(33.404,31.859)
  Bottom Layer w0.254: v1(12.23,45.265) 12.23,47.239 15.724,50.733 25.878,50.733 26.67,51.525 26.67,53.14 27.305,53.775 28.58,53.775 29.165,54.36 29.165,56.07 28.715,56.52 24.76,56.52 23.06,54.82 16.924,54.82 16.919,54.825 13.71,54.825 13.395,54.825 13.39,54.82 8.422,54.82 2.437,48.835 -0.087,48.835 -0.767,48.155 -0.767,30.552 0.665,29.12 J4.6 2.03,30.355 4.395,30.355 7.859,33.819 9.457,33.819 9.458,33.82 32.415,33.82 33.455,32.78 33.455,31.909 v1(33.404,31.859)
PA.13: J4.5 R6.1 STM32F103.34 UART1.3 | length 119.4
  Top Layer w0.254: R6.1@21.23,47.205 24.615,47.205 27.895,50.485 UART1.3 ; STM32F103.34 31.804,29.439 32.504,30.139 32.504,30.716 v1(32.628,30.84)
  Bottom Layer w0.254: J4.5 2.998,29.12 2.672,28.794 2.469,28.794 1.505,27.83 0.041,27.83 -1.211,29.082 -1.211,48.321 -0.266,49.266 2.258,49.266 8.18,55.189 8.18,55.625 8.18,56.514 9.278,57.611 30.999,57.611 31.675,56.935 31.675,54.758 30.557,53.641 29.066,53.641 UART1.3 ; J4.5@3.341,29.18 4.375,29.18 8.582,33.387 9.635,33.387 9.637,33.389 32.191,33.389 32.628,32.952 v1(32.628,30.84)
PA.14: J4.4 R7.2 STM32F103.37 UART1.5 | length 116.7
  Top Layer w0.254: R7.2@21.24,45.555 23.576,45.555 30.435,52.414 UART1.5 ; STM32F103.37 25.74,31.09 25.823,31.007 27.752,31.007 28.33,31.585 v1(28.33,32.285)
  Bottom Layer w0.254: -1.656,48.487 -1.656,28.916 0.479,26.781 1.151,26.781 2.24,27.87 4.215,27.87 9.3,32.955 9.814,32.955 9.816,32.957 27.658,32.957 v1(28.33,32.285) ; -1.566,48.576 -0.445,49.698 2.079,49.698 7.748,55.368 7.748,55.804 7.748,56.693 9.099,58.043 31.871,58.043 34.03,55.885 34.03,54.235 33.436,53.641 31.606,53.641 UART1.5
PA.15: J4.3 NRF24L01.8 STM32F103.38 | length 39.3
  Top Layer w0.191: J4.3@3.895,26.565 J4.3@3.97,26.64
  Top Layer w0.254: NRF24L01.8@0.727,17.818 2.085,19.175 2.085,24.345 3.335,25.595 J4.3 ; STM32F103.38 25.24,32.695 25.533,32.988 26.517,32.988 26.905,32.6 v1(26.905,31.825)
  Bottom Layer w0.254: J4.3@3.97,26.64 4.105,26.64 9.175,31.71 ; 9.18,31.71 9.995,32.525 26.205,32.525 v1(26.905,31.825)
PB.0: J3.15 NRF24L01.3 pad.5 STM32F103.18 | length 79.8
  Top Layer w0.254: NRF24L01.3@3.438,12.623 3.534,12.719 3.534,13.618 9.236,19.319 20.032,19.319 22.74,22.028 STM32F103.18 22.74,26.62 23.296,27.176 23.296,28.331 v1(23.42,28.455) ; v1(37.487,29.081) 37.506,29.1 42.18,29.1 44.409,26.871 46.273,26.871 47.192,27.79 49.055,27.79 49.53,28.265 49.53,34.53 50.455,35.455 51.73,35.455 52.065,35.79 52.065,40.085 51.71,40.44 49.51,40.44 J3.15@48.225,41.725
  Bottom Layer w0.254: v1(23.42,28.455) 24.032,29.067 36.529,29.067 v1(37.487,29.081) ; pad.5@44.685,41.685 J3.15@48.04,41.685
PB.1: J3.16 STM32F103.19 | length 44.7
  Top Layer w0.254: STM32F103.19 23.24,25.232 23.239,25.234 23.239,25.348 23.371,25.48 23.371,26.182 v1(23.495,26.306)
  Bottom Layer w0.254: v1(23.495,26.306) 23.495,26.438 24.642,27.585 40.721,27.585 43.341,30.206 51.331,30.206 52.04,30.915 52.04,40.49 J3.16
PB.2: J3.13 NRF24L01.4 pad.6 R9.2 STM32F103.20 | length 90.7
  Top Layer w0.254: NRF24L01.4@0.837,12.618 2.045,11.41 3.83,11.41 4.595,12.175 4.595,14.045 9.425,18.875 20.216,18.875 23.74,22.399 STM32F103.20 23.749,23.648 23.749,24.43 23.75,24.432 23.75,24.935 24.25,25.435 24.25,29.805 v1(24.22,29.835) ; v1(25.585,36.565) 25.585,36.478 26.219,35.844 34.096,35.844 37.447,39.195 pad.6@44.889,39.195
  Bottom Layer w0.254: v1(24.22,29.835) 36.34,29.835 37.41,30.905 37.41,31.815 36.752,32.564 36.603,32.713 33.482,35.861 33.334,36.01 28.875,36.01 26.205,36.01 25.65,36.565 v1(25.585,36.565) ; 28.875,36.043 v1(28.875,37.24) ; pad.6@44.889,39.195 J3.13@48.245,39.195
PB.3: J3.14 STM32F103.39 | length 30.3
  Top Layer w0.254: STM32F103.39 24.74,32.824 25.451,33.535 36.295,33.535 38.19,35.43 45.765,35.43 46.68,36.345 46.68,37.175 47.49,37.985 49.565,37.985 J3.14
PB.4: J3.11 pad.7 STM32F103.40 | length 26.9
  Top Layer w0.254: STM32F103.40 24.24,32.952 25.283,33.995 36.11,33.995 38.681,36.566 pad.7@44.832,36.566 ; pad.7 44.849,36.566 pad.7@44.832,36.566 ; pad.7@44.9,36.5 44.842,36.556 pad.7@44.832,36.566
  Bottom Layer w0.254: pad.7@44.83,36.635 J3.11@48.245,36.635
PB.5: J3.12 STM32F103.41 | length 31.1
  Top Layer w0.254: STM32F103.41 23.74,33.081 25.129,34.47 35.885,34.47 38.2,36.785 38.2,36.791 38.493,37.083 38.498,37.083 39.4,37.985 v1(40.395,37.985)
  Bottom Layer w0.254: v1(40.395,37.985) 49.685,37.985 50.785,36.885 J3.12
PB.6: J3.9 pad.8 STM32F103.42 | length 30.5
  Top Layer w0.191: pad.8@44.733,34.02 pad.8@44.868,34.155
  Top Layer w0.254: STM32F103.42 23.24,33.209 24.986,34.955 34.464,34.955 36.309,36.8 v1(36.95,36.8)
  Bottom Layer w0.254: v1(36.95,36.8) 36.95,34.85 37.65,34.15 44.863,34.15 48.21,34.15 J3.9@48.325,34.035
PB.7: J3.10 STM32F103.43 | length 34.8
  Top Layer w0.254: STM32F103.43 22.74,33.338 24.801,35.399 34.28,35.399 37.07,38.19 v1(38.065,38.19)
  Bottom Layer w0.254: v1(38.065,38.19) 38.065,35.785 38.386,35.464 49.501,35.464 J3.10@50.812,34.152
PB.8: J3.7 pad.9 STM32F103.45 | length 34.9
  Top Layer w0.254: STM32F103.45 21.74,34.499 26.12,38.879 31.672,38.879 31.799,38.752 32.621,38.752 v1(32.63,38.743)
  Bottom Layer w0.254: v1(32.63,38.743) 32.63,37.558 32.63,37.46 32.695,37.388 33.877,36.078 37.571,32.383 38.564,31.527 43.6,31.549 44.63,31.55 44.84,31.55 pad.9 48.18,31.52 J3.7
PB.9: J3.8 STM32F103.46 | length 39.1
  Top Layer w0.254: STM32F103.46 21.24,34.627 26.11,39.498 33.392,39.498 v1(34.25,38.64)
  Bottom Layer w0.254: v1(34.25,38.64) 34.25,36.315 37.75,32.815 48.435,32.815 49.665,31.585 J3.8
PB.10: J3.5 pad.10 STM32F103.21 UART2.4 | length 59.2
  Top Layer w0.254: UART2.4@18.905,0.92 17.645,-0.34 15.65,-0.34 15.09,0.22 15.09,4.249 24.24,13.399 24.24,24.814 25.015,25.589 25.015,26.36 v1(25.075,26.42)
  Bottom Layer w0.254: v1(25.075,26.42) 25.075,26.507 25.709,27.141 40.887,27.141 42.801,29.055 44.856,29.055 44.89,29.088 J3.5@48.245,29.099
PB.11: J3.6 STM32F103.22 UART2.3 | length 61.9
  Top Layer w0.254: UART2.3 15.56,1.73 15.56,4.007 24.74,13.187 24.74,20.675 ; STM32F103.22 24.74,20.675 ; J3.6 52.056,27.773 52.054,22.689 50.028,20.664 24.74,20.675
PB.12: J3.3 STM32F103.25 | length 22.8
  Top Layer w0.254: STM32F103.25 43.16,24.939 43.415,24.684 v1(43.59,24.684)
  Bottom Layer w0.254: v1(43.59,24.684) 43.555,24.719 43.555,25.915 44.175,26.535 J3.3@48.245,26.535
PB.13: J3.4 STM32F103.26 | length 23.6
  Top Layer w0.254: STM32F103.26 44.32,25.439 44.575,25.184 v1(44.75,25.184)
  Bottom Layer w0.254: v1(44.75,25.184) 44.843,25.277 49.557,25.277 50.225,25.945
PB.14: J3.1 STM32F103.27 | length 22
  Top Layer w0.254: STM32F103.27 45.502,25.939 47.546,23.895 J3.1@48.23,23.895
PB.15: J3.2 STM32F103.28 | length 24.7
  Top Layer w0.254: STM32F103.28 45.631,26.439 46.805,25.265 49.41,25.265 J3.2@50.748,23.927
PC.13: FLASH.1 J3.17 pad.4 STM32F103.2 | length 53.2
  Top Layer w0.254: v1(13.616,36.397) 13.616,36.283 13.085,35.752 13.085,30.05 13.66,29.475 14.356,29.475 14.357,29.474 15.973,29.474 16.444,29.945 STM32F103.2@18.94,29.945
  Bottom Layer w0.254: FLASH.1 13.61,41.125 14.73,42.245 26.644,42.245 32.729,42.245 33.929,43.445 43.805,43.445 44.55,44.19 pad.4 ; FLASH.1@13.615,37.81 13.613,37.808 13.613,36.4 v1(13.616,36.397) ; pad.4@44.889,44.22 48.18,44.22 J3.17
PC.14: C7.2 J4.2 STM32F103.3 Y2.4 | length 46.5
  Top Layer w0.254: v1(10.32,29.92) 11.242,28.998 16.17,28.998 16.611,29.438 STM32F103.3@18.939,29.438 ; STM32F103.3 20.264,29.439 20.584,29.759 v1(22.626,29.759) ; C7.2 29.22,17.84 v1(29.22,16.6) 29.344,16.724 29.964,16.724 31.825,18.585 Y2.4
  Bottom Layer w0.254: J4.2 1.78,24.04 2.94,25.199 5.599,25.199 v1(10.32,29.92) ; v1(22.626,29.759) 22.626,22.119 27.296,17.45 28.37,17.45 v1(29.22,16.6)
PC.15: C8.2 J4.1 STM32F103.4 Y2.1 | length 40.5
  Top Layer w0.254: v1(10.315,28.78) 10.49,28.78 10.717,28.553 16.354,28.553 16.74,28.939 STM32F103.4 20.246,28.939 20.638,28.547 21.733,28.547 v1(21.785,28.495) ; C8.2 27.58,17.845 v1(27.58,16.58) 27.585,16.58 28.48,15.685 30.89,15.685 Y2.1
  Bottom Layer w0.254: J4.1@3.97,24.1 5.715,24.1 10.315,28.7 v1(10.315,28.78) ; v1(21.785,28.495) 21.785,22.35 27.555,16.58 v1(27.58,16.58)
PD.0: C6.1 R11.2 STM32F103.5 Y1.2 | length 28.1
  Top Layer w0.254: v1@10.235,27.57 10.774,28.109 16.538,28.109 16.869,28.439 STM32F103.5 ; Y1.2 11.21,17.032 v1(11.21,15.605) 11.83,14.985 11.83,13.665 C6.1@11.815,13.65 ; C6.1@12.016,13.46 R11.2@14.144,13.455 ; R11.2@14.225,13.445 R11.2@14.355,13.445
  Bottom Layer w0.254: v1@10.235,27.57 9.495,26.83 9.495,17.32 v1(11.21,15.605)
  other v1: 10.315,27.57
PD.1: C5.1 R11.1 STM32F103.6 Y1.1 | length 35.2
  Top Layer w0.254: v1@10.225,26.06 10.225,26.11 11.779,27.664 16.722,27.664 16.997,27.939 STM32F103.6 ; R11.1@16.196,13.445 18.855,13.445 18.91,13.5 C5.1@18.91,13.56 ; C5.1@19.065,13.538 19.065,14.895 v1(19.87,15.7) 19.87,17.088 Y1.1
  Bottom Layer w0.254: v1@10.225,26.06 10.225,17.6 12.125,15.7 v1(19.87,15.7)
  other v1: 10.315,26.06
VBAT: D3.2 D4.2 STM32F103.1 | length 6.6
  Top Layer w0.254: v1(16.965,31.105) 16.975,30.735 17.271,30.439 STM32F103.1
  Bottom Layer w0.254: D4.2 15.355,28.14 D3.2 ; D3.2@15.345,31.105 v1(16.965,31.105)
VCC: Designator60.1 F.2 | length 5
  Top Layer w0.254: F.2 15.475,48.015 Designator60.1
"VCC 3.3V": "BOOT 0.1" "BOOT 0.2" AMS1117.2 C3.1 C4.1 C10.1 C11.1 C12.2 D3.1 Designator2.5 ESP8266.2 ESP8266.4 ESP8266.6 FLASH.3 FLASH.7 FLASH.8 J3.18 J4.19 L1.1 LED2.A NRF24L01.2 R1.2 R4.2 R6.2 R10.1 R14.1 R15.1 R16.1 STM32F103.24 STM32F103.36 STM32F103.48 UART1.1 UART2.1 | length 304.3
  Top Layer w0.254: NRF24L01.2@0.725,10.085 9.925,0.885 UART2.1@11.285,0.885 ; v1(9.085,46.25) 10.39,46.25 R4.2@10.49,46.35 ; v1(10.34,31.16) 10.34,36.323 10.905,36.888 AMS1117.2@11.105,37.088 ; v1(11.145,39.92) 11.105,39.88 AMS1117.2@11.105,37.088 ; UART2.1@11.398,0.875 11.398,1.168 17.675,7.445 LED2.A@17.675,10.825 ; v1(13.933,30.558) 14.938,30.558 C11.1 15.34,30.33 15.72,30.71 15.72,30.74 16.164,31.184 16.164,32.351 16.774,32.961 18.475,32.961 ; v1(18.135,47.185) 18.146,47.174 18.146,41.749 18.645,41.25 R1.2 C3.1@19.58,38.885 ; v1@18.205,47.185 19.275,47.185 R6.2 ; v1(18.495,31.345) 18.475,31.365 18.475,32.961 ; STM32F103.48 20.24,32.746 20.026,32.961 18.475,32.961 ; v1(21.4,39.38) 20.075,39.38 C3.1@19.58,38.885 ; STM32F103.24 25.74,23.654 25.791,23.705 v1(27.57,23.705) 27.57,22.51 C10.1 ; STM32F103.36 29.359,30.439 C12.2@29.635,30.715 ; v1(28.715,30.795) 29.595,30.795 C12.2@29.655,30.735 ; C12.2 29.65,32.44 30.173,32.963 45.512,32.963 46.58,31.895 46.58,28.245 v1(46.568,28.233) ; R10.1 42.12,8.399 42.12,9.54 42.805,10.225 ESP8266.2 ; ESP8266.4@48.2,12.86 ESP8266.6@48.2,15.4 ; AMS1117.2@11.105,37.088 11.339,37.322 16.471,37.322 16.905,36.888 17.583,36.888 C3.1 C3.1@19.58,38.885
  Top Layer w0.381: R4.2@10.49,46.35 R4.2
  Bottom Layer w0.254: J4.19 8.435,46.9 v1(9.085,46.25) 9.085,46.26 9.215,46.39 9.263,46.342 10.103,46.342 10.413,46.032 ; v1(10.34,31.16) 10.885,30.615 D3.1 12.085,30.585 13.015,30.585 ; FLASH.3 11.108,38.168 11.108,39.883 v1(11.145,39.92) ; UART2.1@11.285,0.935 11.285,-0.285 11.956,-0.956 14.661,-0.956 39.259,-0.956 48.22,8.005 48.22,10.215 41.52,10.215 40.35,11.385 40.35,18.285 39.22,19.415 R16.1 ; v1(13.015,26.675) 13.015,30.585 ; FLASH.8 FLASH.7 12.34,44.13 12.167,44.303 12.142,44.303 10.413,46.032 ; FLASH.8@13.61,43.37 16.94,43.37 18.135,44.565 v1(18.135,47.185) ; v1(13.933,30.558) 13.905,30.585 13.015,30.585 ; v1(18.495,31.345) 19.045,30.795 v1(28.715,30.795) ; v1(21.4,39.38) 22.965,40.945 28.275,40.945 30.815,40.945 32.04,40.945 34.108,43.013 49.513,43.013 50.712,44.212 J3.18@50.742,44.212 ; UART1.1 25.044,52.47 23.739,51.165 15.545,51.165 10.413,46.033 ; v1(27.57,23.705) 34.155,23.705 ; R14.1 32.64,19.445 R15.1 34.2,19.43 ; Designator2.5 33.375,13.11 33.375,14.635 34.2,15.46 34.2,19.43 ; R16.1@36.815,19.43 36.655,19.43 34.2,19.43 ; v1(46.568,28.233) 46.529,28.194 45.939,28.194 45.7,27.955 42.311,27.955 38.061,23.705 34.155,23.705 ; ESP8266.2@48.19,10.255 ESP8266.4@48.19,12.795 ; 34.155,23.705 34.2,23.66 34.2,19.43
"VCC 5V": AMS1117.3 C1.1 C2.1 Designator59.1 F.1 J3.19 pad.3 UART1.6 | length 65.1
  Top Layer w0.254: C2.1@11.72,43.492 15.42,43.492 ; C1.1 15.281,41.333 ; F.1@15.43,45.89 15.43,40.413 16.655,39.188 AMS1117.3 ; F.1 15.61,46.325 15.958,46.673 15.958,46.683 17.832,48.557 22.547,48.557 23.89,49.9 23.89,55.795 25.36,57.265 30.45,57.265 ; UART1.6@30.45,55.01 30.45,57.265 ; J3.19@48.245,46.865 44.99,46.837 40.692,46.8 38.47,49.022 Designator59.1 38.47,56.725 37.93,57.265 30.45,57.265
VDDA: C9.1 L1.2 STM32F103.9 | length 7.6
  Top Layer w0.254: L1.2@13.01,23.96 C9.1@15.055,23.96 ; C9.1@15.075,23.955 15.127,24.007 15.962,24.007 16.17,24.215 16.17,25.315 17.294,26.439 STM32F103.9
pads on no net: Designator2.1 Designator2.8 Designator2.9 Designator2.10 Designator2.11 Designator2.12 Designator2.13 Designator2.14 Designator60.4 Designator60.5@10.55,52.625 Designator60.5@10.55,56.125 Designator60.5@17.8,52.625 Designator60.5@17.8,56.125 ESP8266.3 ESP8266.5 Y2.2 Y2.3

## Polygon pours and split planes (outlines as drawn)
GND on Top Layer "GND_L01_P009" (solid, remove dead copper, pour order 9): 54.157,59.505 -2.96,59.505 -2.96,-1.766 54.157,-1.766
GND on Bottom Layer "GND_L02_P013" (solid, remove dead copper, pour order 13): 54.835,59.505 54.72,59.62 -3.195,59.62 -3.195,-2.04 54.72,-2.04

## Keep-outs
Keep-Out Layer:
  lines w0.191: -2.63,2.485 ccw(c1.563,2.737) 1.815,-1.455 49.73,-1.455 ccw(c49.742,2.562) 53.76,2.55 53.76,54.98 ccw(c49.697,55.012) 49.73,59.075 1.345,59.075 ccw(c1.388,55.057) -2.63,55.015 -2.63,2.51

## Other copper
Top Layer:
  rectangle net NetR2_1: 13.14,47.86 14.43,48.38
  rectangle net PC.15: 30.45,14.735 31.33,16.635
  rectangle net PA.14: 21.44,44.87 21.955,46.17
  rectangle net PA.13: 21.375,46.57 21.965,47.87
  rectangle net NetBOOT_4: 26.72,36.235 27.67,36.645
  rectangle net BOOT0: 29.925,37.955 30.88,38.485
  rectangle net NetBOOT_3: 32.515,36.68 33.075,37.975
  rectangle net NetBOOT_4: 26.72,36.5 27.67,36.83
  region net NetBOOT_3: 33.39,37.4 33.27,37.64 33.075,37.975 32.86,37.76 32.86,37.35
  region net NetBOOT_3: 33.075,36.68 33.17,36.845 33.39,37.235 33.37,37.255 32.815,37.255
  region net NetBOOT_4: 27.885,36.385 27.875,36.385 27.63,36.63 27.575,36.575 27.575,36.39
Bottom Layer:
  rectangle net "VCC 3.3V": 32.95,12.745 33.8,13.475

## Silkscreen, mask and mechanical layers (free items; w line width, h text height)
Top Overlay:
  lines w0.191: 23.54,48.075 24.32,47.295 27.005,47.295 ; 32.085,47.295 33.645,47.295 ; 33.413,47.29 ccw(c33.469,48.088) 34.265,48.17 ; 34.26,48.155 34.26,48.405 34.26,49.755 ; 41.97,48.1 46.97,48.1 ; 41.995,48.125 43.06,49.19 49.75,49.19 50.845,48.095 ; 43.135,27.805 43.135,48.08 ; 43.18,27.76 46.975,27.76
  text "5V" at 38.865,57.785 h1.3 r180
  text "GND" at 41.975,57.73 h1.3 r179.5
  text "SWD" at 37.57,52.16 h1.3 r180
  text "TXD" at 26.15,49.88 h1.3 r180
  text "RXD" at 28.66,49.86 h1.3 r180
  text "5V" at 31.19,49.8 h1.3 r180
  text "GND" at 33.935,49.74 h1.3 r180
  text "3.3V" at 26.13,48.81 h1.3 r180
  text "DIO" at 28.64,48.77 h1.3 r180
  text "CLK" at 31.21,48.77 h1.3 r180
  text "GND" at 33.935,48.75 h1.3 r180
  text "GND" at 5.965,47.896 h1.3 r270
  text "3.3V" at 7.17,47.82 h1.3 r270
  text "5V" at 40.21,46.13 h1.3 r90
  text "GND" at 41.715,45.821 h1.3 r90
  text "A0" at 5.92,44.86 h1.3 r270
  text "A1" at 7.135,44.788 h1.3 r270
  text "R4" at 9.815,44.675 h1.3
  text "R3" at 11.53,44.685 h1.3
  text "C13" at 40.21,43.33 h1.3 r90
  text "3.3V" at 41.715,43.172 h1.3 r90
  text "A2" at 5.955,42.555 h1.3 r270
  text "A3" at 7.135,42.555 h1.3 r270
  text "BOOT 1" at 33.51,41.76 h1.3 r89.42
  text "B1" at 41.715,41.367 h1.3 r90
  text "B0" at 40.21,41.22 h1.3 r90
  text "A4" at 5.965,40.005 h1.3 r270
  text "A5" at 7.145,39.989 h1.3 r270
  text "B2" at 40.21,38.605 h1.3 r90
  text "B3" at 41.715,38.605 h1.3 r90
  text "A7" at 7.19,37.516 h1.3 r270
  text "A6" at 6.01,37.5 h1.3 r270
  text "B4" at 40.21,36.065 h1.3 r90
  text "B5" at 41.715,36.081 h1.3 r90
  text "A8" at 5.985,35.11 h1.3 r270
  text "A9" at 7.165,35.094 h1.3 r270
  text "B6" at 40.21,33.59 h1.3 r90
  text "B7" at 41.715,33.574 h1.3 r90
  text "A10" at 5.98,32.835 h1.3 r270
  text "A11" at 7.145,32.783 h1.3 r270
  text "B8" at 40.21,30.96 h1.3 r90
  text "B9" at 41.715,30.976 h1.3 r90
  text "A12" at 5.965,30.11 h1.3 r270
  text "A13" at 7.145,30.11 h1.3 r270
  text "B11" at 41.715,28.332 h1.3 r90
  text "B10" at 40.21,28.185 h1.3 r90
  text "A14" at 5.965,27.66 h1.3 r270
  text "A15" at 7.145,27.644 h1.3 r270
  text "B12" at 40.21,25.69 h1.3 r90
  text "B13" at 41.715,25.69 h1.3 r90
  text "C14" at 5.935,25.065 h1.3 r270
  text "C15" at 7.115,25.049 h1.3 r270
  text "B15" at 41.715,23.196 h1.3 r90
  text "B14" at 40.21,23.18 h1.3 r90
  text "OLED/TFT" at 45.37,22.9 h1 r91.08
  text "BLUETOOTH" at 10.265,4.185 h1.3
  text "3.3V" at 10.28,2.735 h1.3
  text "GND" at 12.925,2.735 h1.3
  text "RX" at 15.88,2.735 h1.3
  text "TX" at 18.355,2.735 h1.3
  text "UART2" at 5.595,0.49 h1.3 r359.86
Bottom Overlay:
  drawing of 435 lines, arcs and shapes, not listed
  text "5V" at 37.66,57.815 h1.3 r180.4
  text "GND" at 39.475,57.715 h1.3 r180.73
  text "UART1" at 34.27,57.04 h1.3
  text "SWD" at 37.55,51.32 h1.3
  text "1" at 29.8,48.05 h1.3
  text "OLED AND TFT" at 41.675,47.435 h1.3 r90
  text "SUPER GREEN PILL" at 24.395,46.635 h1.3
  text "R.E.V  1.01" at 13.345,45.295 h1.3
  text "BCCT 1" at 33.32,45.23 h1.3 r90
  text "BOOT 0" at 26.365,45.095 h1.3 r90
  text "A.YOUSEFI" at 24.255,42.195 h0.93
  text "0" at 29.82,38.389 h1.3
  text "BOOT1" at 26.12,35.93 h1.3
  text "BOOT0" at 31.45,35.895 h1.3
  text "MODE" at 36.6,35.885 h1.3
  text "0" at 29.985,34.195 h1.3
  text "X" at 24.815,34.15 h1.3
  text "FLASH" at 36.6,34.15 h1.3
  text "0" at 24.665,32.56 h1.3
  text "ISP" at 36.535,32.56 h1.3
  text "1" at 29.885,32.535 h1.3
  text "SRAM" at 36.555,30.96 h1.3
  text "1" at 29.905,30.935 h1.3
  text "1" at 24.575,30.89 h1.3
  text "-" at 17.965,23.69 h1.3
  text "+" at 8.77,23.67 h1.3
  text "ESP8266" at 52.06,19.97 h1.3
  text "NRF24L01" at 4.59,19.895 h1.3
  text "TF-CARD" at 46.02,7.44 h1.3 r359.41

## Text inside footprints (layer, text, board x,y; h text height)
Designator60: Top Overlay "USB" at 15.445,56.633 h1.02 r180